# Altium PCB pcb.PcbDoc
Units mm, origin at the board's own origin, x right, y up, seen from the top; angles counter-clockwise.
Board outline 49.8 x 99.8 mm, 2 copper layers (Top Layer, Bottom Layer), stack 1.571 mm thick; 71 components, 59 nets, 301 pads, 9 vias.
Unrouted connection lines stored in the file: 75.
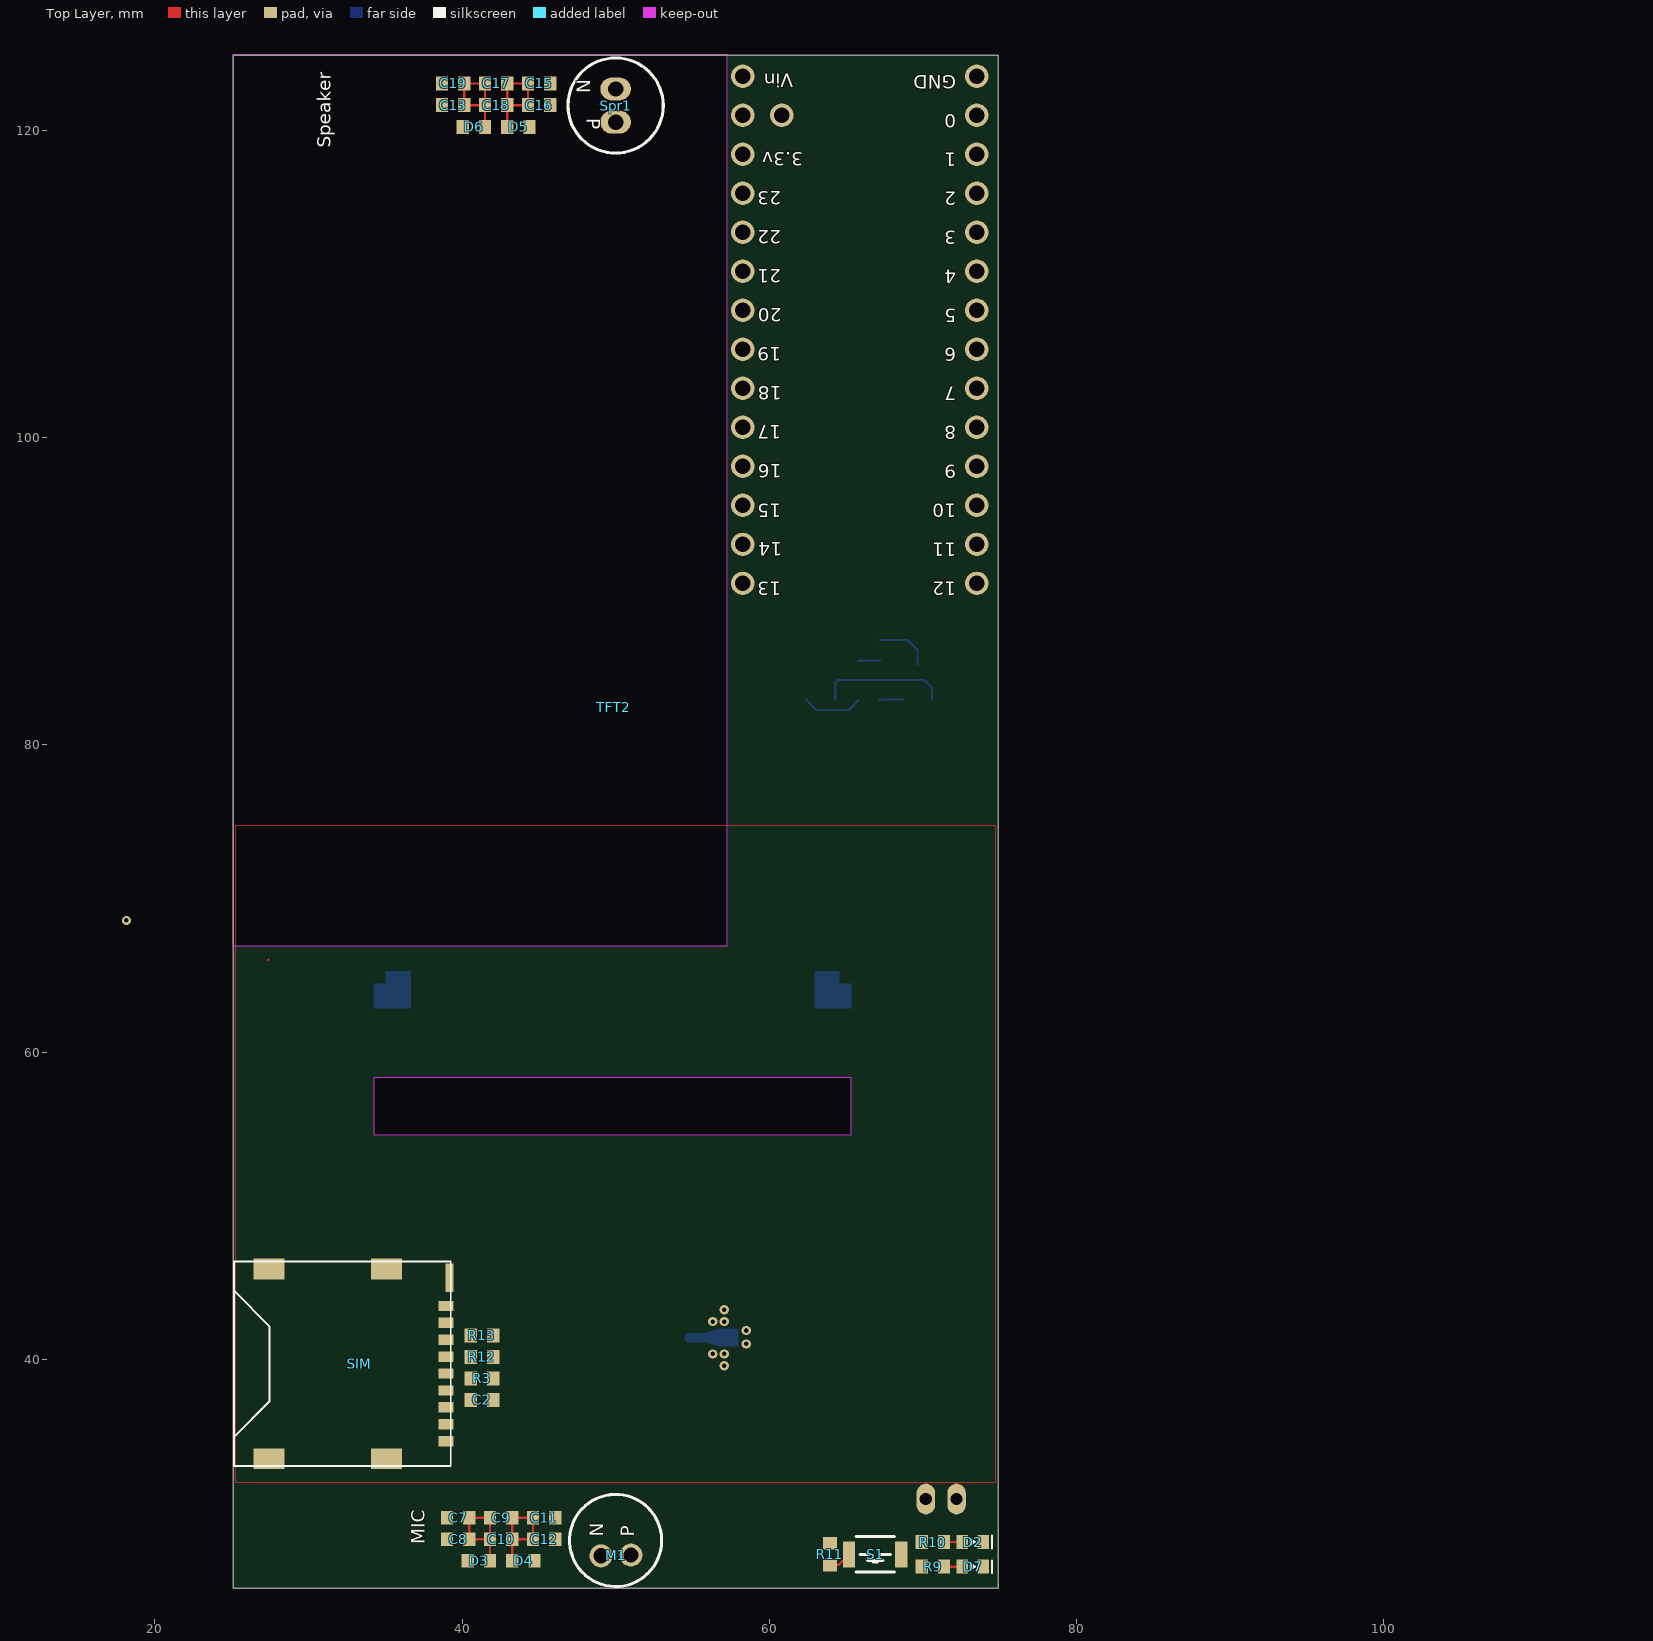
[diagram p0: Top Layer view]
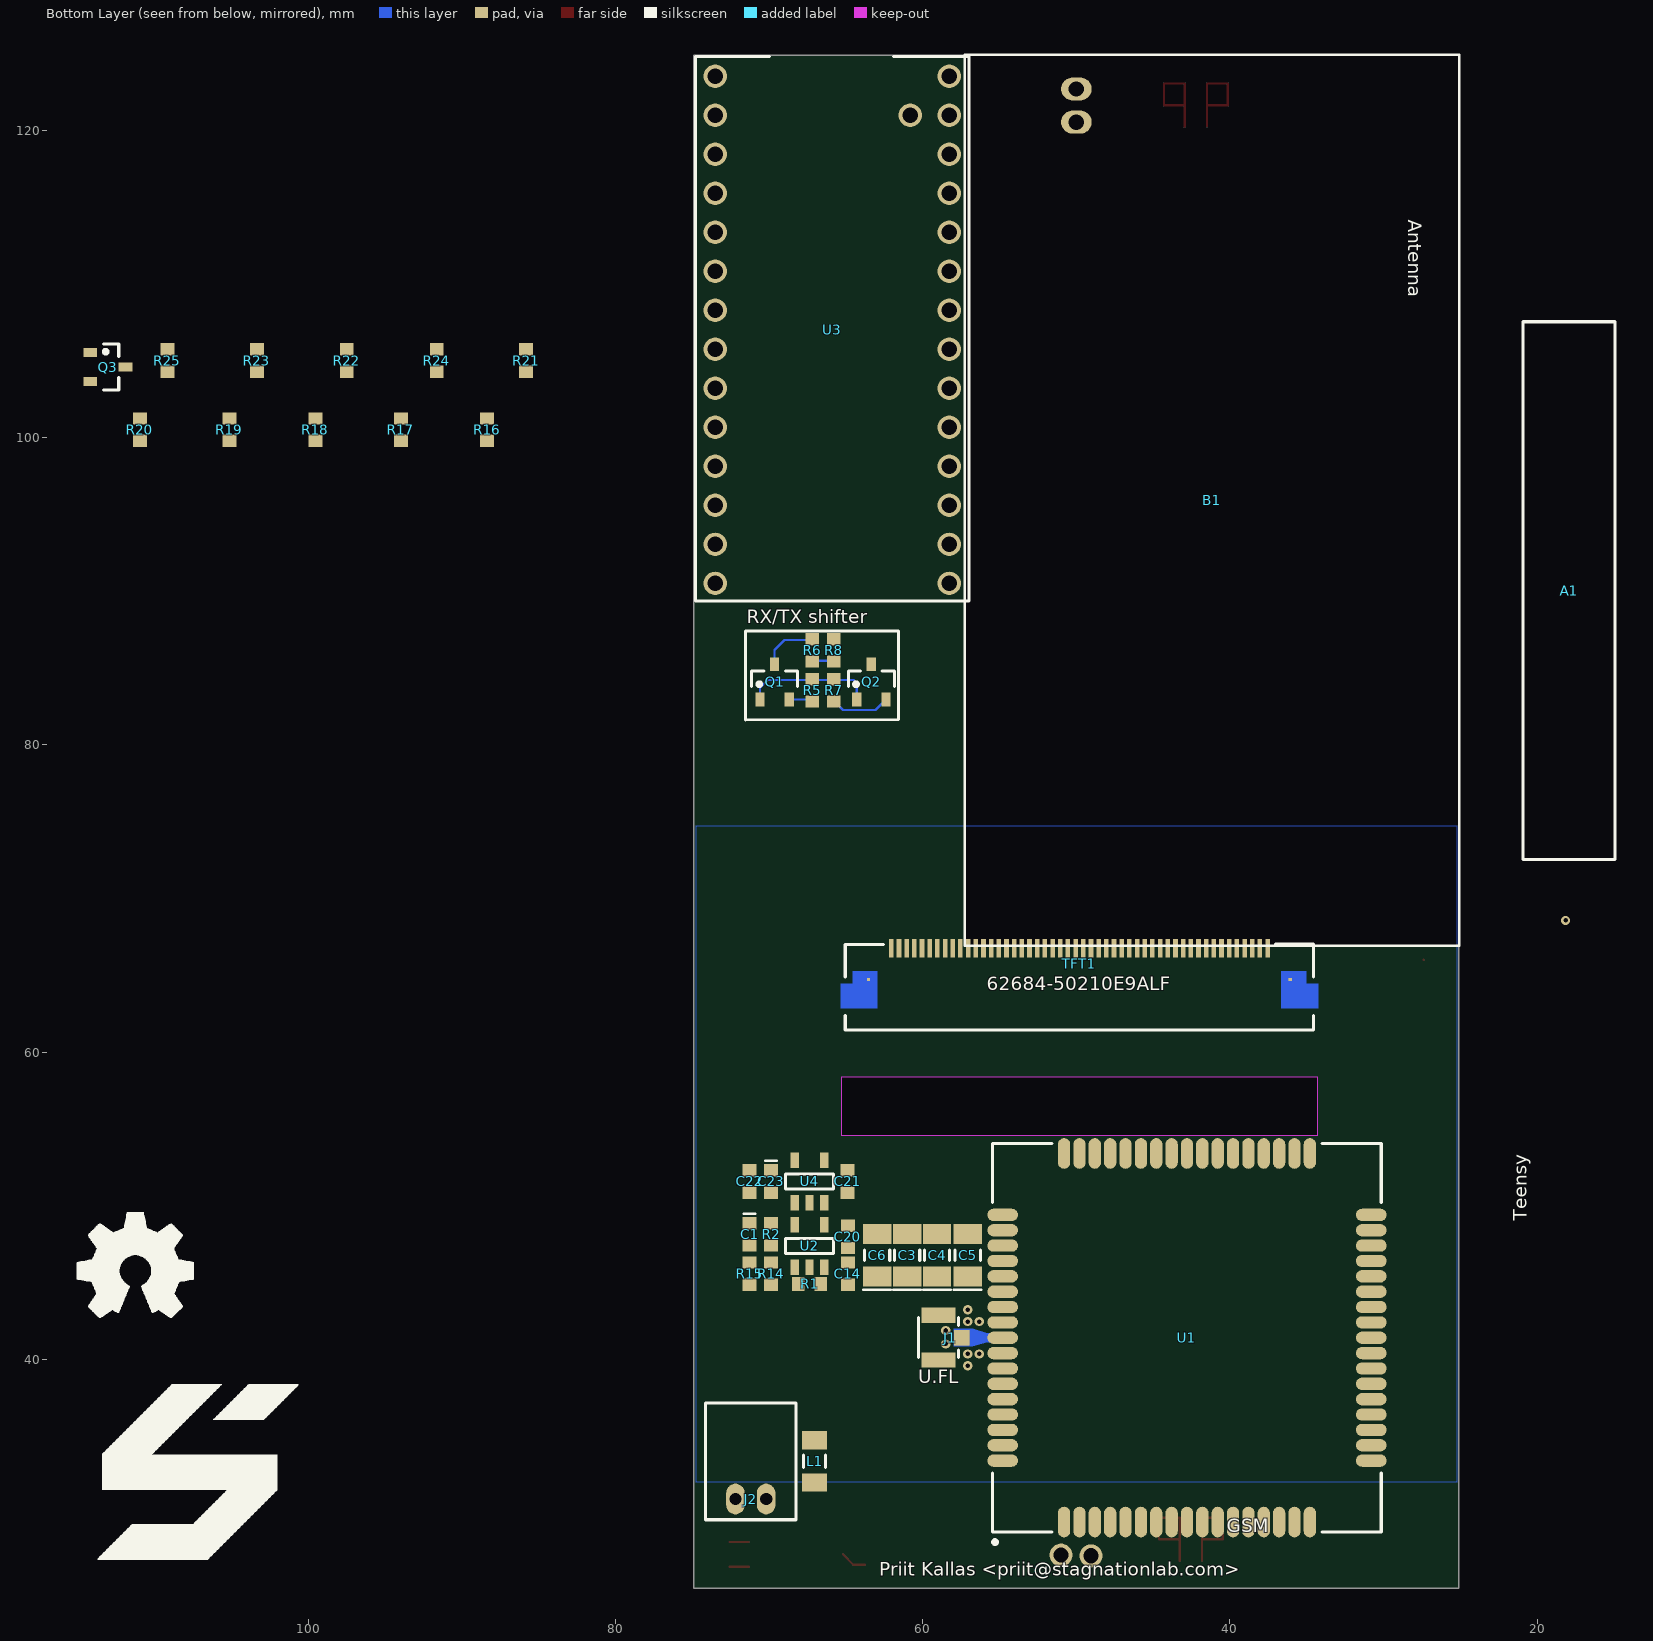
[diagram p1: Bottom Layer view, seen from below]

## Layer stack, top to bottom
Top Solder: solder mask 0.0102, Solder Resist, Dk 3.5
Top Layer: signal copper 0.0356
Dielectric 1: dielectric 1.5, FR-4, Dk 4.8
Bottom Layer: signal copper 0.0356
Bottom Solder: solder mask 0.0102, Solder Resist, Dk 3.5

## Board outline
25.1,25.1 25.1,124.9 74.9,124.9 74.9,25.1

## Design rules (kind name [scope] priority, off if disabled: settings)
Clearance [All] p1: gap=0.152
DiffPairsRouting [All] p1: maxlimit=0.254 minlimit=0.254 mostfreqgap=0.254 toplayer_minwidth=0.152 toplayer_maxwidth=0.381 toplayer_prefwidth=0.152 bottomlayer_minwidth=0.152 bottomlayer_maxwidth=0.381 bottomlayer_prefwidth=0.152 maxuncoupledlength=12.7
HoleSize [All] p1: absolutevalues=TRUE maxlimit=6.35 minlimit=0.3 maxpercent=80.000 minpercent=20.000
MinimumSolderMaskSliver [All] p1: minsoldermaskwidth=0.152
PlaneClearance [All] p1: clearance=0.25
PlaneConnect [All] p1: planeconnectstyle=Relief reliefexpansion=0.5 reliefentries=4 reliefconductorwidth=0.254 reliefairgap=0.254
PolygonConnect PolygonConnect-GND-VIA [InNet('GND') AND IsVia] p1: connectstyle=Direct reliefconductorwidth=0.254 reliefentries=4 polygonreliefangle="90 Angle" airgapwidth=0.254
PolygonConnect [All] p2: connectstyle=Relief reliefconductorwidth=0.254 reliefentries=4 polygonreliefangle="90 Angle" airgapwidth=0.254
RoutingVias [All] p1: holewidth=0.3 width=0.6 viastyle="Through Hole" minholewidth=0.3 minwidth=0.6 maxholewidth=6.35 maxwidth=8
SilkToSilkClearance [All] p1: silktosilkclearance=0
SilkToSolderMaskClearance [IsPad] p1: minsilkscreentomaskgap=0.05 clearancetoexposedcopper=TRUE
SolderMaskExpansion [All] p1: expansion=0.102
UnpouredPolygon [All] p1: allowunpoured=FALSE
Width [All] p1: maxlimit=4 minlimit=0.152 preferedwidth=0.152
22 further rules are at their usual default settings.

## Classes and differential pairs
differential pair MIC: +MIC_P -MIC_N
differential pair SPR: +SPR_P -SPR_N

## Components (designator, comment, footprint, x,y, rotation, side; value= is the part's Value field where it differs from the comment)
A1 "Value" PCB-ANTENNA 17.925,90.05 r270 bottom
B1 "Battery" BATTERY-2000MAH 41.177,95.923 r90 bottom
C1 "4.7uF" CAP-0603-POL 71.275,48.125 r270 bottom
C2 "CAPACITOR" CAP-0603-GEN 41.3,37.35 r0 top
C3 "100uF" CAP-1206-POL 61.025,46.777 r90 bottom
C4 "100uF" CAP-1206-POL 59.075,46.777 r90 bottom
C5 "100uF" CAP-1206-POL 57.075,46.777 r90 bottom
C6 "100uF" CAP-1206-POL 62.975,46.777 r90 bottom
C7 "10pF" CAP-0603-GEN 39.75,29.677 r180 top
C8 "33pF" CAP-0603-GEN 39.75,28.277 r180 top
C9 "10pF" CAP-0603-GEN 42.55,29.677 r180 top
C10 "33pF" CAP-0603-GEN 42.55,28.277 r180 top
C11 "10pF" CAP-0603-GEN 45.35,29.677 r180 top
C12 "33pF" CAP-0603-GEN 45.35,28.277 r180 top
C13 "33pF" CAP-0603-GEN 39.425,121.65 r0 top
C14 "33pF" CAP-0603-GEN 64.875,45.575 r90 bottom
C15 "10pF" CAP-0603-GEN 45.025,123.06 r0 top
C16 "33pF" CAP-0603-GEN 45.025,121.65 r0 top
C17 "10pF" CAP-0603-GEN 42.225,123.06 r0 top
C18 "33pF" CAP-0603-GEN 42.225,121.65 r0 top
C19 "10pF" CAP-0603-GEN 39.425,123.06 r0 top
C20 "10pF" CAP-0603-GEN 64.875,47.975 r270 bottom
C21 "CAPACITOR" CAP-0603-GEN 64.9,51.575 r270 bottom
C22 "CAPACITOR" CAP-0603-GEN 71.275,51.575 r90 bottom
C23 "CAPACITOR-POLARIZED" CAP-0603-POL 69.875,51.574 r270 bottom
D2 "LED" LED-0603 73.25,28.1 r0 top
D3 "Value" ESD-SUPRESSOR-0603 41.1,26.877 r0 top
D4 "Value" ESD-SUPRESSOR-0603 44,26.877 r0 top
D5 "Value" ESD-SUPRESSOR-0603 43.675,120.235 r180 top
D6 "Value" ESD-SUPRESSOR-0603 40.775,120.235 r180 top
D7 "LED" LED-0603 73.25,26.5 r0 top
J1 "Value" ANTENNA-CONNECTOR 58.975,41.404 r90 bottom
J2 "Value" JST-PH-1x2 71.2,30.9 r90 bottom
L1 "Value" FERRITE-1206 67.05,33.35 r270 bottom
M1 "Value" MICROPHONE 50,28.202 r90 top
Q1 "Value" SOT23-3 69.65,84.1 r90 bottom
Q2 "Value" SOT23-3 63.35,84.1 r90 bottom
Q3 "Mosfet N" SOT23-3 113.05,104.6 r180 bottom
R1 "10K" RESISTOR-0603 67.375,44.9 r180 bottom
R2 "2K" RESISTOR-0603 69.875,48.125 r90 bottom
R3 "22R" RESISTOR-0603 41.3,38.75 r180 top
R5 "10K" RESISTOR-0603 67.2,83.55 r90 bottom
R6 "10K" RESISTOR-0603 67.195,86.15 r270 bottom
R7 "10K" RESISTOR-0603 65.8,83.55 r90 bottom
R8 "10K" RESISTOR-0603 65.8,86.15 r270 bottom
R9 "1K" RESISTOR-0603 70.65,26.5 r180 top
R10 "1K" RESISTOR-0603 70.65,28.1 r180 top
R11 "10K" RESISTOR-0603 63.95,27.3 r270 top
R12 "22R" RESISTOR-0603 41.3,40.15 r180 top
R13 "22R" RESISTOR-0603 41.3,41.55 r0 top
R14 "47K" RESISTOR-0603 69.875,45.575 r270 bottom
R15 "169K" RESISTOR-0603 71.275,45.575 r270 bottom
R16 "RESISTOR" RESISTOR-0603 88.372,100.525 r90 bottom
R17 "RESISTOR" RESISTOR-0603 93.973,100.525 r90 bottom
R18 "RESISTOR" RESISTOR-0603 99.548,100.525 r90 bottom
R19 "RESISTOR" RESISTOR-0603 105.148,100.525 r90 bottom
R20 "RESISTOR" RESISTOR-0603 110.973,100.525 r90 bottom
R21 "RESISTOR" RESISTOR-0603 85.824,105.025 r90 bottom
R22 "RESISTOR" RESISTOR-0603 97.499,105.025 r90 bottom
R23 "RESISTOR" RESISTOR-0603 103.35,105.025 r90 bottom
R24 "RESISTOR" RESISTOR-0603 91.649,105.025 r90 bottom
R25 "RESISTOR" RESISTOR-0603 109.175,105.025 r90 bottom
S1 "Value" TACTILE-SWITCH 66.9,27.3 r180 top
SIM "SIM" WURTH-SIM-693023010811 33.31,39.7 r270 top
Spr1 "Value" SPEAKER-SR6438NWS-000 50,121.625 r270 top
TFT1 "TFT" FCI-62684-50210E9ALF 49.8,66.5 r180 bottom locked
TFT2 "Screen" MI0283QT 49.875,82.45 r270 top locked
U1 "Value" SIM900 42.8,41.4 r90 bottom locked
U2 "Value" SOT23-5 67.375,47.375 r90 bottom
U3 "Value" TEENSY-3.1 65.898,107.025 r270 bottom locked
U4 "Reg" SOT23-5 67.375,51.575 r90 bottom

## Footprints (in the part's own frame and the unit in brackets; to place one, negate y for a bottom-side part, rotate by r counter-clockwise, add the part's x,y. Pads: shape width x height; smd on the part's side, far side on the other; paste and mask are expansions set on the pad)
ANTENNA-CONNECTOR [mm] "PCB UFL antenna connector"
  rect 1x1 smd: 1(0,-1.5)
  rect 1x2.2 smd: 2(-1.45,0) 2(1.45,0)
  silkscreen extent -1.3,-1.3 1.3,1.3, body extent -1.5,-1.55 1.5,1.55, height 1.25
BATTERY-2000MAH [mm] "Li-ion battery"
  Keep-Out Layer board cut-out: -29,16.1 29,16.1 29,-16.1 -29,-16.1
  silkscreen extent -29,-16.1 29,16.1, body extent -29,-16.1 29,16.1
CAP-0603-GEN [mm] "Non-polarized 0603 (1608) chip capacitor"
  rect 0.8x0.9 smd: 1(-0.725,0) 2(0.725,0)
  body extent -0.8,-0.4 0.8,0.4, height 0.86
CAP-0603-POL [mm] "0603 (1608) polarized chip capacitor"
  rect 0.8x0.9 smd: 1(-0.725,0) 2(0.725,0)
  silkscreen extent -1.35,-0.38 -1.35,0.38, body extent -0.8,-0.4 0.8,0.4, height 0.86
CAP-1206-POL [mm] "1206 (3216) polarized chip capacitor"
  rect 1.3x1.85 smd: 1(-1.375,0) 2(1.375,0)
  silkscreen extent -2.25,-0.9 0.35,0.9, body extent -1.7,-0.84 1.7,0.84, height 1.71
ESD-SUPRESSOR-0603 [mm] "0603 (1608) ESD supressor diode"
  rect 0.8x0.9 smd: 1(-0.725,0) 2(0.725,0)
  body extent -0.8,-0.4 0.8,0.4, height 0.5
FCI-62684-50210E9ALF [mm] "FCI 50 pin FPC 0.5mm pitch connector"
  rect 0.3x1.2 smd: 1(-12.25,0.25) 2(-11.75,0.25) 3(-11.25,0.25) 4(-10.75,0.25) 5(-10.25,0.25) 6(-9.75,0.25) 7(-9.25,0.25) 8(-8.75,0.25) 9(-8.25,0.25) 10(-7.75,0.25) 11(-7.25,0.25) 12(-6.75,0.25) 13(-6.25,0.25) 14(-5.75,0.25) 15(-5.25,0.25) 16(-4.75,0.25) 17(-4.25,0.25) 18(-3.75,0.25) 19(-3.25,0.25) 20(-2.75,0.25) 21(-2.25,0.25) 22(-1.75,0.25) 23(-1.25,0.25) 24(-0.75,0.25) 25(-0.25,0.25) 26(0.25,0.25) 27(0.75,0.25) 28(1.25,0.25) 29(1.75,0.25) 30(2.25,0.25) 31(2.75,0.25) 32(3.25,0.25) 33(3.75,0.25) 34(4.25,0.25) 35(4.75,0.25) 36(5.25,0.25) 37(5.75,0.25) 38(6.25,0.25) 39(6.75,0.25) 40(7.25,0.25) 41(7.75,0.25) 42(8.25,0.25) 43(8.75,0.25) 44(9.25,0.25) 45(9.75,0.25) 46(10.25,0.25) 47(10.75,0.25) 48(11.25,0.25) 49(11.75,0.25) 50(12.25,0.25)
  rect 0.2x0.2 smd: 50(-13.725,-1.775) 50(13.725,-1.775)
  Top Layer region: -13.15,-1.25 -13.15,-3.65 -15.55,-3.65 -15.55,-2.05 -14.75,-2.05 -14.75,-1.25
  Top Layer region: 13.15,-1.25 13.15,-3.65 15.55,-3.65 15.55,-2.05 14.75,-2.05 14.75,-1.25
  Keep-Out Layer board cut-out: -15.5,-8.15 -15.5,-11.9 15.5,-11.9 15.5,-8.15
  silkscreen extent -15.25,-5.07 15.25,0.53, body extent -15.25,-5.08 15.25,0.52, height 2
FERRITE-1206 [mm] "1206 (3216) ferrite bead"
  rect 1.2x1.65 smd: 1(-1.375,0) 2(1.375,0)
  silkscreen extent -0.4,-0.72 0.4,0.72, body extent -1.6,-0.8 1.6,0.8, height 0.6
JST-PH-1x2 [mm] "JST-PH single row two contact connector"
  oval 2x1.2 hole 0.8: 1(0,1) 2(0,-1)
  silkscreen extent -1.35,-2.95 6.25,2.95, body extent -1.35,-2.98 6.25,2.92, height 4.8
LED-0603 [mm] "0603 (1608) LED"
  rect 0.75x0.9 smd: 1(-0.675,0) 2(0.675,0)
  silkscreen extent -0.13,-0.4 1.25,0.4, body extent -0.85,-0.36 0.8,0.36, height 0.66
MI0283QT [mm] "MI0283QT TFT"
  body extent -34.57,-25.12 34.68,24.88, height 4.2
MICROPHONE [mm] "Microphone"
  round 1.5 hole 1: 1(-0.95,-1) 2(-1,0.95)
  silkscreen extent -3,-3 3,3, body extent -3,-3 3,3, height 2.7
PCB-ANTENNA [mm] "PCB antenna"
  silkscreen extent -17.5,-3 17.5,3, body extent -17.5,-3 17.5,3, height 1
RESISTOR-0603 [mm] "Chip resistor 0603 (1608)"
  rect 0.8x0.9 smd: 1(-0.725,0) 2(0.725,0)
  body extent -0.8,-0.4 0.8,0.4, height 0.5
SIM900 [mm] "SIM900 GSM Module"
  oval 2x0.8 smd: 1(-12,8) 2(-12,7) 3(-12,6) 4(-12,5) 5(-12,4) 6(-12,3) 7(-12,2) 8(-12,1) 9(-12,0) 10(-12,-1) 11(-12,-2) 12(-12,-3) 13(-12,-4) 14(-12,-5) 15(-12,-6) 16(-12,-7) 17(-12,-8) 35(12,-8) 36(12,-7) 37(12,-6) 38(12,-5) 39(12,-4) 40(12,-3) 41(12,-2) 42(12,-1) 43(12,0) 44(12,1) 45(12,2) 46(12,3) 47(12,4) 48(12,5) 49(12,6) 50(12,7) 51(12,8)
  oval 0.8x2 smd: 18(-8,-12) 19(-7,-12) 20(-6,-12) 21(-5,-12) 22(-4,-12) 23(-3,-12) 24(-2,-12) 25(-1,-12) 26(0,-12) 27(1,-12) 28(2,-12) 29(3,-12) 30(4,-12) 31(5,-12) 32(6,-12) 33(7,-12) 34(8,-12) 52(8,12) 53(7,12) 54(6,12) 55(5,12) 56(4,12) 57(3,12) 58(2,12) 59(1,12) 60(0,12) 61(-1,12) 62(-2,12) 63(-3,12) 64(-4,12) 65(-5,12) 66(-6,12) 67(-7,12) 68(-8,12)
  Top Layer pour cut-out: -7.3,-2.8 -7.3,2.8 -1.7,2.8 -1.7,-2.8
  Top Layer pour cut-out: -2.308,8 -2.171,7.311 -1.781,6.727 -1.197,6.337 -0.508,6.2 -0.508,6.2 -0.492,6.2 0.197,6.337 0.781,6.727 1.171,7.311 1.308,8 1.308,8 1.175,8.671 0.795,9.24 0.226,9.621 -0.446,9.754 -0.446,9.754 -0.554,9.754 -1.226,9.621 -1.795,9.24 -2.175,8.671 -2.309,8 -2.309,8
  silkscreen extent -13.42,-12.65 12.65,12.65, body extent -12,-12 12,12, height 3.02
SOT23-3 [mm] "SOT23 3-leads mosfet"
  rect 0.9x0.6 smd: 1(-1.15,0.95) 2(-1.15,-0.95) 3(1.15,0)
  silkscreen extent -0.3,-1.5 0.7,1.5, body extent -1.4,-1.45 1.4,1.45, height 1.3
SOT23-5 [mm] "SOT23 5-Leads"
  rect 1x0.55 smd: 1(-1.375,0.95) 2(-1.375,0) 3(-1.375,-0.95) 4(1.375,-0.95) 5(1.375,0.95)
  silkscreen extent -0.5,-1.55 0.5,1.55, body extent -1.4,-1.45 1.4,1.45, height 1.45
SPEAKER-SR6438NWS-000 [mm] "Knowles SR6438NWS-000 speaker"
  oval 1.5x2 hole 1: 1(-1.08,0) 2(1.08,0)
  silkscreen extent -3.1,-3.1 3.1,3.1, body extent -3.2,-3.2 3.2,3.2, height 4
TACTILE-SWITCH [mm] "Tactile switch"
  rect 0.8x1.7 smd: 1(-1.7,0) 2(1.7,0)
  silkscreen extent -1.25,-1.15 1.25,1.15, body extent -2,-1.25 2,1.25, height 1.6
TEENSY-3.1 [mil] "Teensy 3.1 breakout"
  round 60 hole 40: 0(-550,-300) 1(-450,-300) 2(-350,-300) 3(-250,-300) 3.3v(-450,300) 4(-150,-300) 5(-50,-300) 6(50,-300) 7(150,-300) 8(250,-300) 9(350,-300) 10(450,-300) 11(550,-300) 12(650,-300) 13(650,300) 14(550,300) 15(450,300) 16(350,300) 17(250,300) 18(150,300) 19(50,300) 20(-50,300) 21(-150,300) 22(-250,300) 23(-350,300) AGND(-550,300) GND(-650,-300) Vin(-650,300) Vusb(-550,200)
  silkscreen extent -700,-350 695,350, body extent -763,-354 699,354, height 271
WURTH-SIM-693023010811 [mm] "WURTH ELEKTRONIK 693023010811 micro SIM"
  rect 0.67x0.95 smd: 1(5.03,5.65) 2(1.73,5.65) 3(-0.47,5.65) 4(-2.67,5.65) 5(3.93,5.65) 6(0.63,5.65) 7(-1.57,5.65) 8(-3.77,5.65) 9(2.83,5.65)
  rect 1.35x2 smd: 5(-6.175,1.775) 5(-6.175,-5.875) 5(6.175,1.775) 5(6.175,-5.875)
  rect 1.88x0.5 smd: 5(-5.61,5.875)
  silkscreen extent -6.65,-8.15 6.65,5.95, body extent -6.65,-8.14 6.65,5.95, height 1.27

## Part data
A1: library part PCB-ANTENNA, "PCB GSM antenna"
B1: library part BATTERY
C1 C3 C4 C5 C6: library part CAPACITOR-POLARIZED, "Polarized capacitor"
C2 C21 C22: "Capacitor"
C7 C8 C9 C10 C11 C12 C13 C14 C15 C16 C17 C18 C19 C20: library part CAPACITOR, "Capacitor"
C23: "Polarized capacitor"
D3 D4 D5 D6: library part ESD-SUPRESSOR, "ESD supressor diode"
J1: library part ANTENNA-CONNECTOR, "Antenna connector"
J2: library part CONNECTOR-1x2, "Single row two contact connector"
L1: library part FERRITE-BEAD, "Ferrite bead"
M1: library part MICROPHONE, "Microphone"
Q1 Q2: library part MOSFET-N, "N-Channel MOSFET"
Q3: library part MOSFET-N, "N-channel mosfet"
R1 R2 R9 R10: library part RESISTOR-SMALL, "Resistor"
R3 R5 R6 R7 R8 R11 R12 R13 R14 R15: library part RESISTOR, "Resistor"
R16 R17 R18 R19 R20 R21 R22 R23 R24 R25: "Resistor"
S1: library part TACTILE-SWITCH, "Tactile switch"
SIM: library part MICRO-SIM, "Micro SIM card holder"
Spr1: library part SPEAKER, "Speaker"
TFT1: library part MI0283QT-11, "MI0283QT 2.8\" TFT"
TFT2: library part MI0283QT, "MI0283QT TFT screen"
U1: library part SIM900, "SIM900 GSM Module"
U2: library part BATTERY-CHARGER-MCP73831, "Single cell battery management"
U3: library part TEENSY-3.1, "Teensy 3.1 breakout"
U4: library part SOT23-REG, "Voltage regulator"

## Via types
v1: diameter 0.6, hole 0.3, Top Layer to Bottom Layer, tented both sides, 9 vias

## Nets (pads, with @x,y where several pads share a name; then routed paths per layer and width w, separated by ;. In a path a pad name is that pad's centre, name@x,y a point inside that pad or via, vN(x,y) a via of type N, cw(c..) or ccw(c..) an arc to the next point about the centre after c; other vN are vias at no path point)
3V3: C23.1 R6.2 R8.2 TFT1.40 TFT1.41 TFT1.42 U3.3.3v U4.5 | length 1.4
  Bottom Layer w0.152: R8.2@65.8,85.475 R6.2@67.195,85.475
ANTENNA: J1.1 U1.60 | length 2.3
  Bottom Layer w0.6: U1.60@54.78,41.404 J1.1@57.093,41.404
BAT_SENSE: R14.2 R15.2 U3.16
BAT_STATE: R1.1 U2.1 U3.15
BTN_TEST: S1.1 U3.14
GND: C1.2 C2.2 C3.2 C4.2 C5.2 C6.2 C7.2 C8.2 C11.1 C12.1 C13.1 C14.1 C15.2 C16.2 C19.1 C20.1 C21.1 C22.1 C23.2 D2.2 D3.1 D4.2 D5.1 D6.2 D7.2 J1.2 J2.2 Q3.3 R2.1 R11.1 R15.1 R25.2 SIM.5 TFT1.6 TFT1.7 TFT1.8 TFT1.9 TFT1.11 TFT1.12 TFT1.13 TFT1.14 TFT1.15 TFT1.16 TFT1.17 TFT1.18 TFT1.19 TFT1.20 TFT1.21 TFT1.22 TFT1.23 TFT1.24 TFT1.43 TFT1.48 TFT1.49 TFT1.50 U1.17 U1.18 U1.29 U1.39 U1.45 U1.46 U1.53 U1.54 U1.58 U1.59 U1.61 U1.62 U1.63 U1.64 U1.65 U2.2 U3.GND U4.2
  other v1: 57.075,39.583 56.325,40.35 57.075,40.35 58.5,41 58.5,41.875 56.325,42.45 57.075,42.45 57.075,43.225 18.15,68.575
GSM_NET: U1.52 U3.1
GSM_RX_HV: Q1.3 R6.1 U3.10 | length 3.6
  Bottom Layer w0.152: R6.1@67.195,86.825 69,86.825 69.65,86.175 Q1.3
GSM_RX_LV: Q1.2 R5.1 U1.10 | length 1.5
  Bottom Layer w0.152: R5.1@67.2,82.875 67.275,82.95 Q1.2
GSM_STATUS: U1.66 U3.0
GSM_TX_HV: Q2.3 R8.1 U3.9
GSM_TX_LV: Q2.2 R7.1 U1.9 | length 3.9
  Bottom Layer w0.152: Q2.2 63.079,82.271 64.698,82.271 64.702,82.275 65.2,82.275 R7.1@65.8,82.875
LCD_BACKLIGHT: R24.2
LCD_D0: TFT1.32
LCD_D1: TFT1.31
LCD_D2: TFT1.30
LCD_D3: TFT1.29
LCD_D4: TFT1.28
LCD_D5: TFT1.27
LCD_D6: TFT1.26
LCD_D7: TFT1.25
LCD_RESET: TFT1.10
LCD_X+: R19.2
LCD_X-: R17.2
LCD_Y+: R18.2
LCD_Y-: R16.2
LED_GREEN: R9.2 U3.4
LED_RED: R10.2 U3.3
MIC_N: C7.1 C8.1 C9.2 C10.2 D3.2 M1.1 U1.20 | length 6.9
  Top Layer w0.152: D3.2 C10.2 ; C10.2 C9.2 C7.1 C8.1 C10.2
MIC_P: C9.1 C10.1 C11.2 C12.2 D4.1 M1.2 U1.19 | length 8.2
  Top Layer w0.152: D4.1 C10.1 ; C9.1 C11.2 ; C10.1 C12.2 C11.2 ; C10.1 43.275,29.673 43.279,29.677 C11.2
NetC22_2: C22.2 U4.4
NetD2_1: D2.1 R10.1 | length 1.3
  Top Layer w0.152: R10.1@71.325,28.1 D2.1
NetD7_1: D7.1 R9.1 | length 1.3
  Top Layer w0.152: R9.1@71.325,26.5 D7.1
NetQ3_1: Q3.1 R24.1 R25.1
NetQ3_2: Q3.2 TFT1.1
NetR2_2: R2.2 U2.5
NetR3_2: R3.2 SIM.2
NetR11_2: R11.2 S1.2 | length 1.7
  Top Layer w0.152: R11.2@63.775,26.625 64.075,26.625 64.525,26.625 S1.2
NetR12_2: R12.2 SIM.3
NetR13_1: R13.1 SIM.7
NetR16_1: R16.1 TFT1.47
NetR17_1: R17.1 TFT1.46
NetR18_1: R18.1 TFT1.45
NetR19_1: R19.1 TFT1.44
NetR20_1: R20.1 TFT1.5
NetR21_1: R21.1 TFT1.4
NetR22_1: R22.1 TFT1.3
NetR23_1: R23.1 TFT1.2
PWRKEY: U1.1 U3.2 | length 0
  Top Layer w0.152: 27.38,65.99 27.4,66.01
SIM_CLK: R12.1 U1.32
SIM_DATA: R13.2 U1.31
SIM_RST: R3.1 U1.33
SIM_VCC: C2.1 SIM.1 U1.30
SPR_N: C15.1 C16.1 C17.2 C18.2 D5.2 Spr1.1 U1.22 | length 6.9
  Top Layer w0.152: D5.2 C18.2 ; C18.2 C17.2 C15.1 C16.1 C18.2
SPR_P: C13.2 C17.1 C18.1 C19.2 D6.1 Spr1.2 U1.21 | length 6.9
  Top Layer w0.152: D6.1 C18.1 ; C18.1 C13.2 C19.2 C17.1 C18.1
VBAT: J2.1 L1.2
VCC: C3.1 C4.1 C5.1 C6.1 C14.2 C20.2 C21.2 L1.1 R1.2 R14.1 R20.2 R21.2 R22.2 R23.2 U1.55 U1.56 U1.57 U2.3 U3.Vin U4.1 U4.3
VDD_EXT: Q1.1 Q2.1 R5.2 R7.2 U1.15 | length 8.4
  Bottom Layer w0.152: Q2.1 64.3,84.025 64.5,84.225 65.8,84.225 67.2,84.225 70.1,84.225 70.6,83.725 Q1.1
VUSB: C1.1 U2.4 U3.Vusb
pads on no net: SIM.4 SIM.6 SIM.8 SIM.9 TFT1.33 TFT1.34 TFT1.35 TFT1.36 TFT1.37 TFT1.38 TFT1.39 U1.2 U1.3 U1.4 U1.5 U1.6 U1.7 U1.8 U1.11 U1.12 U1.13 U1.14 U1.16 U1.23 U1.24 U1.25 U1.26 U1.27 U1.28 U1.34 U1.35 U1.36 U1.37 U1.38 U1.40 U1.41 U1.42 U1.43 U1.44 U1.47 U1.48 U1.49 U1.50 U1.51 U1.67 U1.68 U3.5 U3.6 U3.7 U3.8 U3.11 U3.12 U3.13 U3.17 U3.18 U3.19 U3.20 U3.21 U3.22 U3.23 U3.AGND

## Polygon pours and split planes (outlines as drawn)
GND on Bottom Layer "Bottom GND" (solid, shelved, pour order 2): 74.75,74.75 25.25,74.75 25.25,32 31.75,32 74.75,32
GND on Top Layer "Top GND" (solid, shelved, pour order 4): 74.75,74.75 25.25,74.75 25.25,32 31.75,32 74.75,32

## Other copper
Bottom Layer:
  region net ANTENNA: 56.7,41.975 55.8,41.7 55.8,41.109 56.733,40.85 57.975,40.85 57.975,41.975

## Silkscreen, mask and mechanical layers (free items; w line width, h text height)
Top Overlay:
  rectangle: 7.751,99.125 7.901,103.175
  region: 6.658,101.443 7.897,101.443 7.897,101.893 6.658,101.458
  text "Speaker" at 31.756,118.885 h1.5 r90
  text "3V3" at 7.686,99.325 h1.5 r90
  text "MIC" at 37.861,27.945 h1.5 r90
Bottom Overlay:
  drawing of 856 lines, arcs and shapes, not listed
  text "Antenna" at 28.7,114.2 h1.5 r90
  text "RX/TX shifter" at 71.45,87.625 h1.5
  text "SIM" at 3.625,64.6 h1.5 r180
  text "Teensy" at 20.375,49.025 h1.5 r270
  text "U.FL" at 60.3,38.15 h1.5
  text "GSM" at 40.212,28.453 h1.5
  text "Priit Kallas <priit@stagnationlab.com>" at 62.848,25.6 h1.5
  text "Li-ion" at 32.725,16.975 h1.5
Mechanical 1:
  the board outline again, w0.2

## Text inside footprints (layer, text, board x,y; h text height)
M1: Top Overlay "N" at 49.5,28.452 h1.5 r90; Top Overlay "P" at 51.5,28.452 h1.5 r90
Spr1: Top Overlay "P" at 47.835,120.813 h1.5 r270; Top Overlay "N" at 48.65,122.428 h1.5 r90
TFT1: Bottom Overlay "62684-50210E9ALF" at 55.847,63.731 h1.52
U3: Top Overlay "1" at 72.173,118.837 h1.5 r180; Top Overlay "2" at 72.173,116.3 h1.5 r180; Top Overlay "5" at 72.173,108.677 h1.5 r180; Top Overlay "6" at 72.173,106.14 h1.5 r180; Top Overlay "9" at 72.173,98.54 h1.5 r180; Top Overlay "10" at 72.173,95.992 h1.5 r180; Top Overlay "0" at 72.173,121.363 h1.5 r180; Top Overlay "GND" at 72.173,123.9 h1.5 r180; Top Overlay "4" at 72.173,111.226 h1.5 r180; Top Overlay "3" at 72.173,113.752 h1.5 r180; Top Overlay "8" at 72.173,101.066 h1.5 r180; Top Overlay "7" at 72.173,103.614 h1.5 r180; Top Overlay "11" at 72.173,93.466 h1.5 r180; Top Overlay "12" at 72.173,90.929 h1.5 r180; Top Overlay "3.3v" at 62.218,118.885 h1.5 r180; Top Overlay "23" at 60.78,116.343 h1.5 r180; Top Overlay "20" at 60.813,108.717 h1.5 r180; Top Overlay "19" at 60.797,106.186 h1.5 r180; Top Overlay "16" at 60.811,98.549 h1.5 r180; Top Overlay "15" at 60.78,96.007 h1.5 r180; Top Overlay "Vin" at 61.561,123.979 h1.5 r180; Top Overlay "21" at 60.789,111.27 h1.5 r180; Top Overlay "22" at 60.795,113.812 h1.5 r180; Top Overlay "17" at 60.797,101.102 h1.5 r180; Top Overlay "18" at 60.801,103.633 h1.5 r180; Top Overlay "14" at 60.841,93.476 h1.5 r180; Top Overlay "13" at 60.786,90.923 h1.5 r180